# EAGLE board heart (EAGLE 5.06)
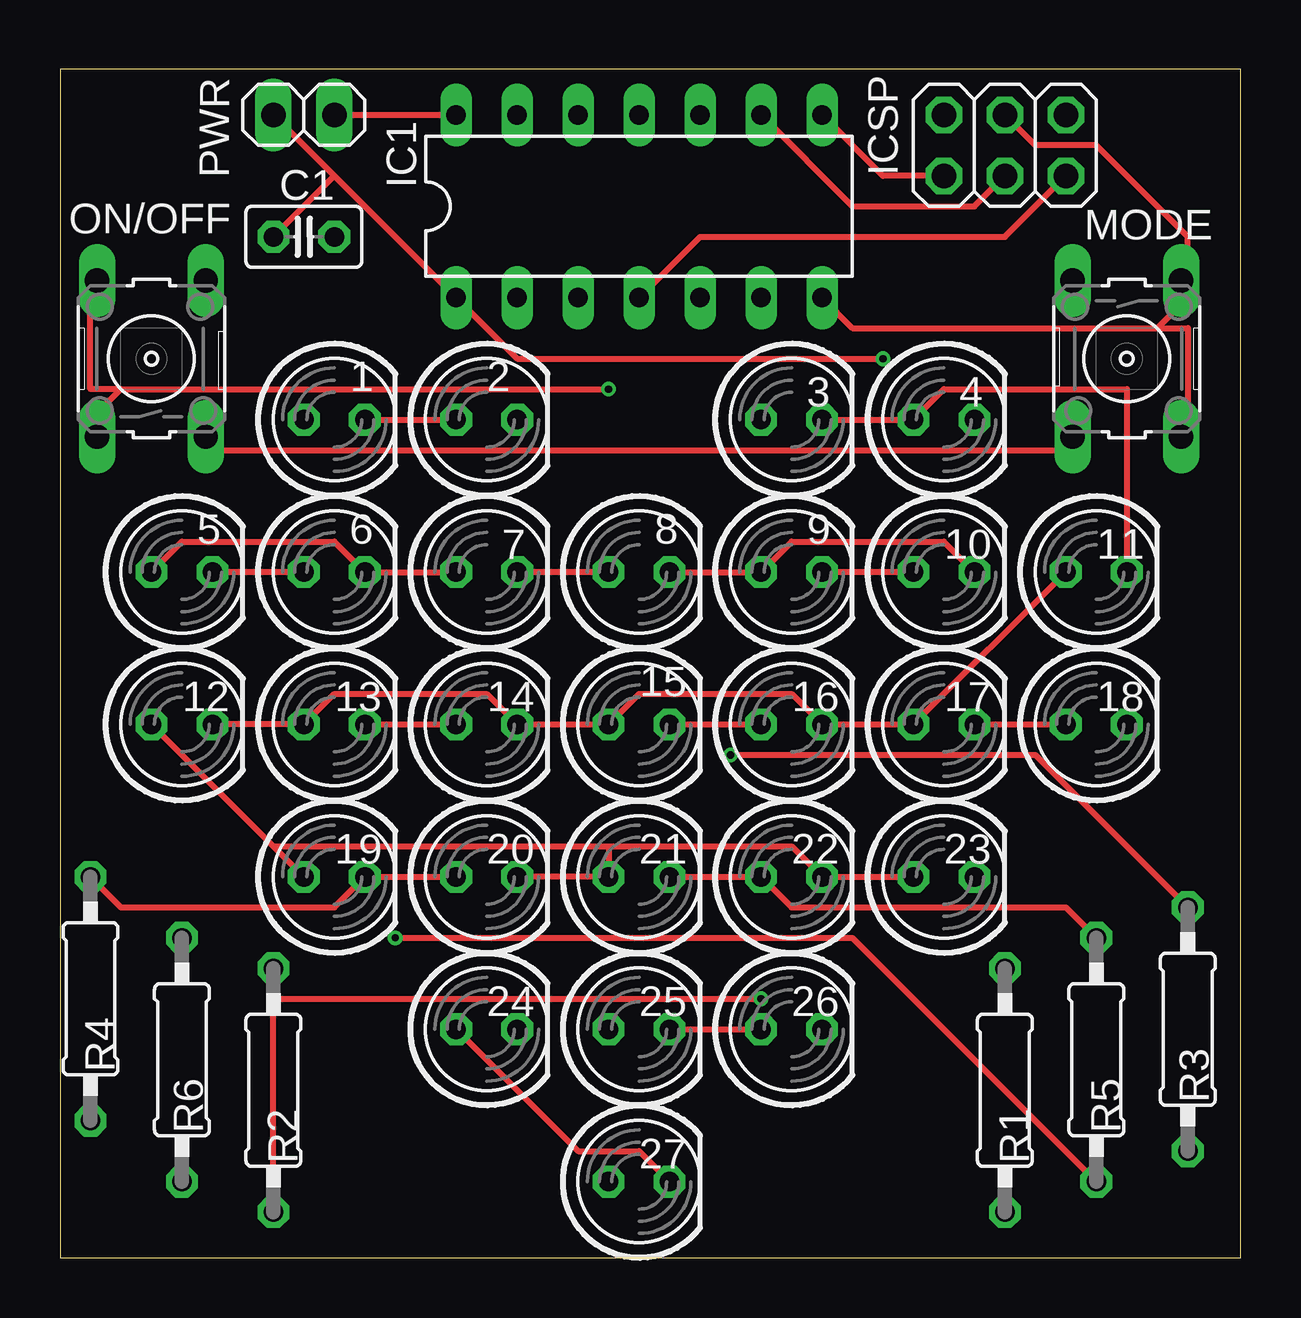
[diagram p0: board, top side]
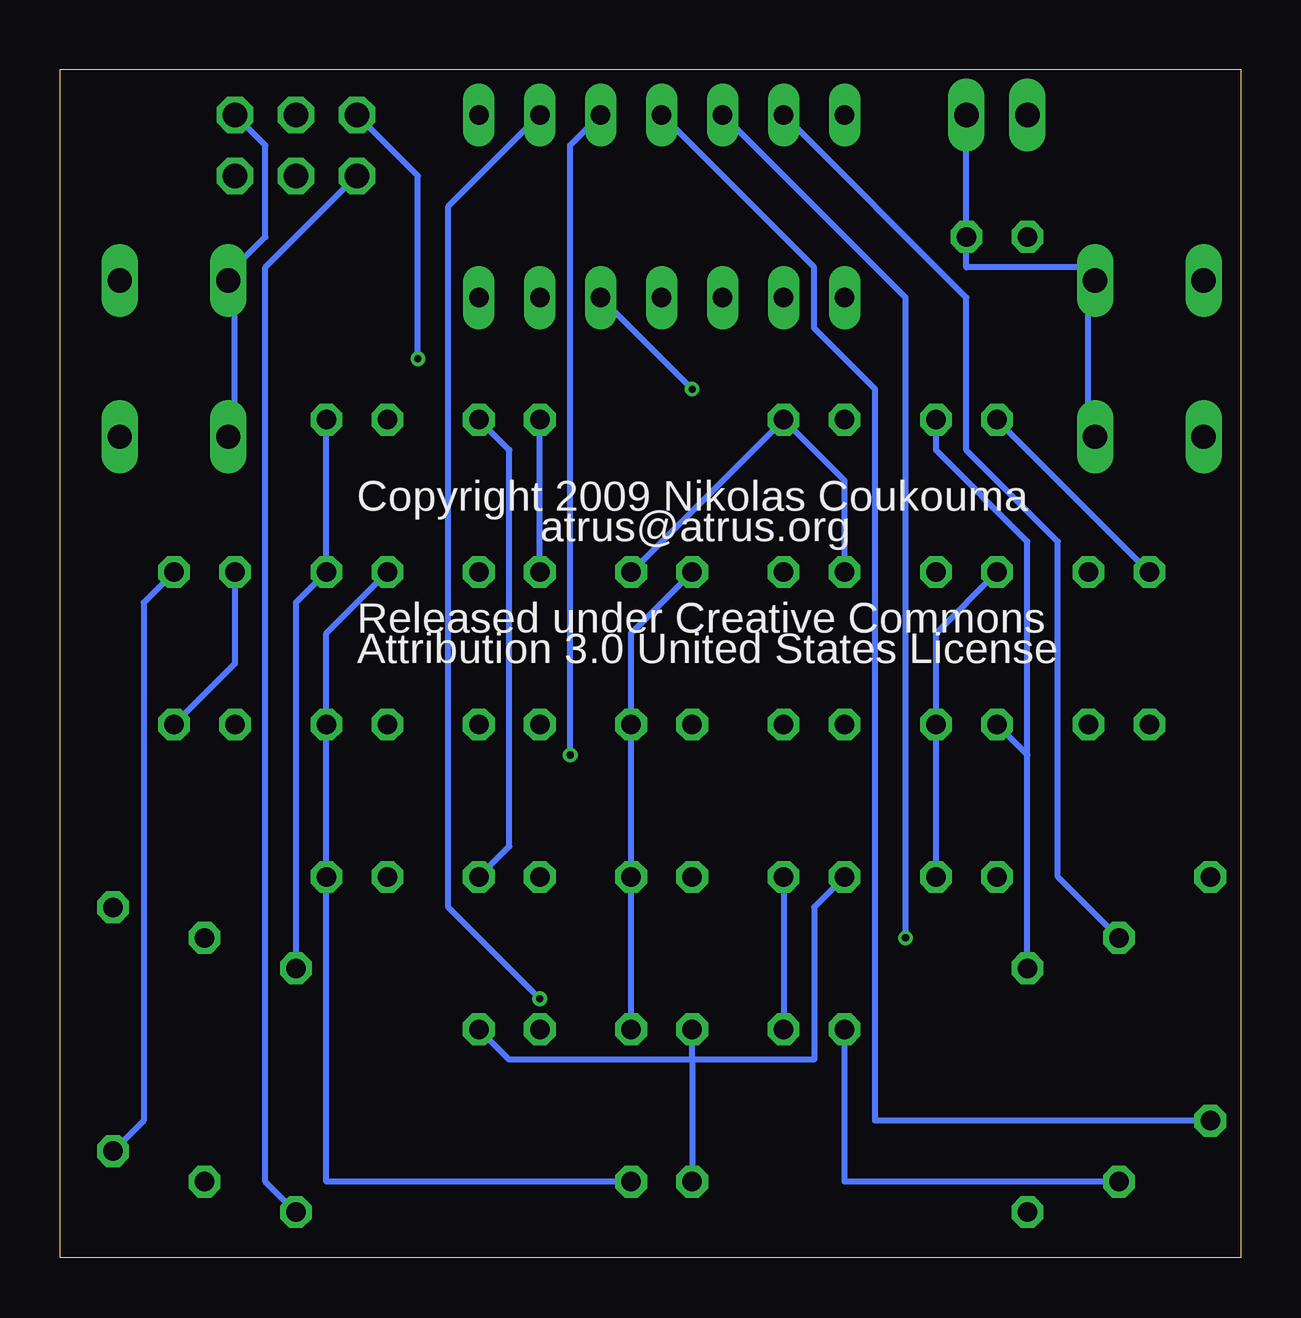
[diagram p1: board, bottom side, seen from below]

Size 49.2 x 49.52 mm. Coordinates in mm from the lower left corner, seen from the top.
Outline: 0,0 49.2,0 49.2,49.52 0,49.52 0,0
Copper layers (1*16): Top 0.035mm / dielectric 1.5mm / Bottom 0.035mm
Design rules "Fusion_eagle_rule_v1.1 *": minimum track width 10mil, minimum drill 12mil, track to track 10mil, track to pad 10mil, pad to pad 10mil, via to via 10mil, smd to smd 0mil, copper to edge 20mil, drill to drill 20mil, minimum pad ring 10mil, minimum via ring 6mil, stop-mask expansion 2mil, vias tented up to drill 100mil, thermal gap 10mil

## Footprints (pad centres in the part's own frame; a part is rotated, then mirrored left to right if it is on the bottom)
LED5MM = drill 0.813 octagon: A -1.27,0; K 1.27,0
C025-025X050 = drill 0.813 octagon: 1 -1.27,0; 2 1.27,0
DIL14 = drill 0.813 long: 1 -7.62,-3.81; 2 -5.08,-3.81; 3 -2.54,-3.81; 4 0,-3.81; 5 2.54,-3.81; 6 5.08,-3.81; 7 7.62,-3.81; 8 7.62,3.81; 9 5.08,3.81; 10 2.54,3.81; 11 0,3.81; 12 -2.54,3.81; 13 -5.08,3.81; 14 -7.62,3.81
2X03 = drill 1.016 octagon: 1 -2.54,-1.27; 2 -2.54,1.27; 3 0,-1.27; 4 0,1.27; 5 2.54,-1.27; 6 2.54,1.27
B3F-10XX = drill 1.016 long: 1 -3.251,2.261; 2 3.251,2.261; 3 -3.251,-2.261; 4 3.251,-2.261
1X02 = drill 1.016 long: 1 -1.27,0; 2 1.27,0
0207/10 = drill 0.813 octagon: 1 -5.08,0; 2 5.08,0

## Placement (x,y rotation side)
1  [LED5MM]  11.43,34.92 0 top
2  [LED5MM]  17.78,34.92 0 top
3  [LED5MM]  30.48,34.92 0 top
4  [LED5MM]  36.83,34.92 0 top
5  [LED5MM]  5.08,28.57 0 top
6  [LED5MM]  11.43,28.57 0 top
7  [LED5MM]  17.78,28.57 0 top
8  [LED5MM]  24.13,28.57 0 top
9  [LED5MM]  30.48,28.57 0 top
10  [LED5MM]  36.83,28.57 0 top
11  [LED5MM]  43.18,28.57 0 top
12  [LED5MM]  5.08,22.22 0 top
13  [LED5MM]  11.43,22.22 0 top
14  [LED5MM]  17.78,22.22 0 top
15  [LED5MM]  24.13,22.22 0 top
16  [LED5MM]  30.48,22.22 0 top
17  [LED5MM]  36.83,22.22 0 top
18  [LED5MM]  43.18,22.22 0 top
19  [LED5MM]  11.43,15.88 0 top
20  [LED5MM]  17.78,15.88 0 top
21  [LED5MM]  24.13,15.88 0 top
22  [LED5MM]  30.48,15.88 0 top
23  [LED5MM]  36.83,15.88 0 top
24  [LED5MM]  17.78,9.53 0 top
25  [LED5MM]  24.13,9.53 0 top
26  [LED5MM]  30.48,9.53 0 top
27  [LED5MM]  24.13,3.18 0 top
C1  0.1uF  [C025-025X050]  10.16,42.55 0 top
IC1  TINY24/44/84-PU  [DIL14]  24.13,43.81 0 top
ICSP  [2X03]  39.37,46.36 0 top
MODE  [B3F-10XX]  44.45,37.47 270 top
ON/OFF  [B3F-10XX]  3.81,37.47 90 top
PWR  [1X02]  10.16,47.62 0 top
R1  75  [0207/10]  39.37,6.98 90 top
R2  75  [0207/10]  8.89,6.98 90 top
R3  75  [0207/10]  46.99,9.53 270 top
R4  75  [0207/10]  1.27,10.8 90 top
R5  75  [0207/10]  43.18,8.25 90 top
R6  75  [0207/10]  5.08,8.25 270 top

## Library data of the parts
1-27 = led
C1 R1-R6 = rcl
IC1 = avr-4
ICSP PWR = pinhead
MODE ON/OFF = switch-omron

## Nets
GND: C1.2 IC1.14 ICSP.6 MODE.3 MODE.4 ON/OFF.3 ON/OFF.4 PWR.2
MISO: IC1.8 ICSP.1 R1.1
MOSI: IC1.7 ICSP.4 MODE.1 MODE.2
N$1: IC1.13 R6.1
N$2: IC1.12 R5.1
N$3: IC1.11 R4.1
N$4: IC1.5 ON/OFF.1 ON/OFF.2
N$5: IC1.10 R3.1
NR1: 1.A 2.K 3.A 4.K 5.A 6.K 7.A 8.K 9.A 10.K R1.2
NR2: 1.K 2.A 11.A 12.K 13.A 14.K 15.A 16.K 17.A 18.K R2.2
NR3: 3.K 4.A 11.K 12.A 19.A 20.K 21.A 22.K 23.A 24.K R3.2
NR4: 5.K 6.A 13.K 14.A 19.K 20.A 25.A 26.K 27.A R4.2
NR5: 7.K 8.A 15.K 16.A 21.K 22.A 25.K 26.A R5.2
NR6: 9.K 10.A 17.K 18.A 23.K 24.A 27.K R6.2
RESET: IC1.4 ICSP.5
SCK: IC1.9 ICSP.3 R2.1
VCC: C1.1 IC1.1 ICSP.2 PWR.1

## Tracks (layer width: path | path; a pad name or v marks a point on that pad's centre or on a via)
GND
  Top 0.254: PWR.2 IC1.14 | MODE.4 41.91,33.66 6.35,33.66 ON/OFF.3
  Bottom 0.254: MODE.4 41.91,34.92 41.91,40 MODE.3 41.91,41.28 40.64,42.55 40.64,46.36 ICSP.6 | ON/OFF.3 6.35,34.92 6.35,40 ON/OFF.4 6.35,41.28 11.43,41.28 C1.2 PWR.2
MISO
  Top 0.254: IC1.8 34.29,45.08 ICSP.1
  Bottom 0.254: R1.1 40.64,3.18 40.64,41.28 ICSP.1
MOSI
  Top 0.254: IC1.7 33.02,38.73 45.72,38.73 | 45.72,38.73 46.99,40 MODE.1 46.99,41.28 46.99,42.55 43.18,46.36 40.64,46.36 ICSP.4 | 45.72,38.73 46.99,38.73 46.99,34.92 MODE.2
N$1
  Bottom 0.254: R6.1 7.62,15.88 7.62,29.85 11.43,33.66 11.43,40 IC1.13
N$2  (via drill 0.3)
  Top 0.254: R5.1 33.02,13.34 v13.97,13.34
  Bottom 0.254: v13.97,13.34 13.97,40 IC1.12
N$3
  Bottom 0.254: R4.1 15.24,5.71 15.24,36.2 17.78,38.73 17.78,41.28 IC1.11
N$4  (via drill 0.3)
  Top 0.254: 2.54,36.2 v22.86,36.2 | 2.54,36.2 1.27,34.92 ON/OFF.1 | 2.54,36.2 1.27,36.2 1.27,40 ON/OFF.2
  Bottom 0.254: v22.86,36.2 IC1.5
N$5  (via drill 0.3)
  Top 0.254: R3.1 40.64,20.96 v27.94,20.96
  Bottom 0.254: v27.94,20.96 27.94,46.36 IC1.10
NR1
  Top 0.254: 8.K 9.A 30.48,29.85 36.83,29.85 10.K | 7.A 6.K 11.43,29.85 5.08,29.85 5.A
  Bottom 0.254: 4.K 10.K 39.37,27.31 R1.2 | 5.A 1.A | 9.A 3.A | 7.A 16.51,32.39 2.K 8.K
NR2
  Top 0.254: 11.A 17.A 16.K 30.48,23.5 24.13,23.5 15.A 14.K 17.78,23.5 11.43,23.5 13.A 12.K | 1.K 2.A
  Bottom 0.254: 18.K 41.91,24.76 11.A | R2.2 8.89,20.96 | 8.89,20.96 13.A | 1.K 12.7,33.66 8.89,29.85 8.89,20.96
NR3
  Top 0.254: 20.K 21.A 22.86,17.14 | 23.A 22.K 30.48,17.14 22.86,17.14 | 12.A 8.89,17.14 | 8.89,17.14 19.A | 8.89,17.14 22.86,17.14 | 3.K 4.A 36.83,36.2 44.45,36.2 11.K
  Bottom 0.254: 20.K 24.K | R3.2 45.72,5.71 45.72,27.31 11.K | 22.K 30.48,17.14 30.48,33.66 3.K
NR4
  Top 0.254: 6.A 5.K | 13.K 14.A | R4.2 2.54,14.61 11.43,14.61 19.K 20.A
  Bottom 0.254: 22.86,8.25 25.A | 22.86,8.25 27.A | 26.K 30.48,8.25 22.86,8.25 | 19.K 13.K 12.7,26.04 6.A | 22.86,8.25 17.78,8.25 17.78,14.61 20.A
NR5
  Top 0.254: 8.A 7.K | 15.K 16.A | 25.K 26.A | 21.K 22.A 30.48,14.61 41.91,14.61 R5.2
  Bottom 0.254: 25.K 21.K 15.K 25.4,26.04 8.A
NR6
  Top 0.254: 10.A 9.K | 17.K 18.A | 24.A 21.59,4.45 24.13,4.45 27.K
  Bottom 0.254: R6.2 16.51,3.18 24.A | 27.K 38.1,3.18 23.K 17.K 38.1,26.04 10.A
RESET
  Top 0.254: IC1.4 26.67,42.55 39.37,42.55 ICSP.5
SCK  (via drill 0.3)
  Top 0.254: R2.1 8.89,10.8 v29.21,10.8 | ICSP.3 38.1,43.81 33.02,43.81 IC1.9
  Bottom 0.254: v29.21,10.8 33.02,14.61 33.02,43.81 IC1.9
VCC  (via drill 0.3)
  Top 0.254: 11.43,45.08 PWR.1 | 11.43,45.08 IC1.1 19.05,37.47 v34.29,37.47 | C1.1 11.43,45.08
  Bottom 0.254: ICSP.2 34.29,45.08 v34.29,37.47

## Text on the board
bNames: Copyright 2009 Nikolas Coukouma | atrus@atrus.org | Released under Creative Commons | Attribution 3.0 United States License